# Altium PCB Flashlight PCB.PcbDoc
Units mil, origin at the board's own origin, x right, y up, seen from the top; angles counter-clockwise.
Board outline 480 x 1490 mil, 2 copper layers (Top Layer, Bottom Layer); 14 components, 13 nets, 40 pads, 5 vias.
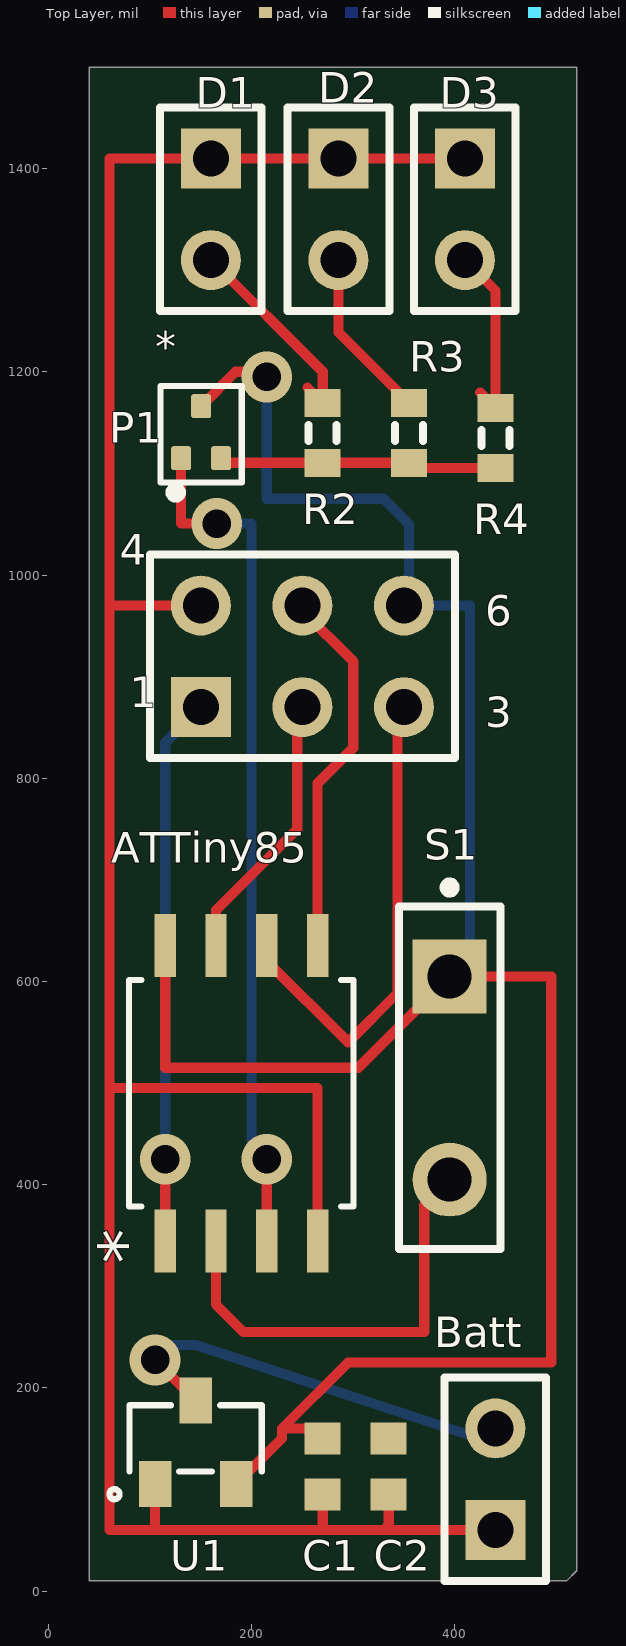
[diagram p0: Top Layer view]
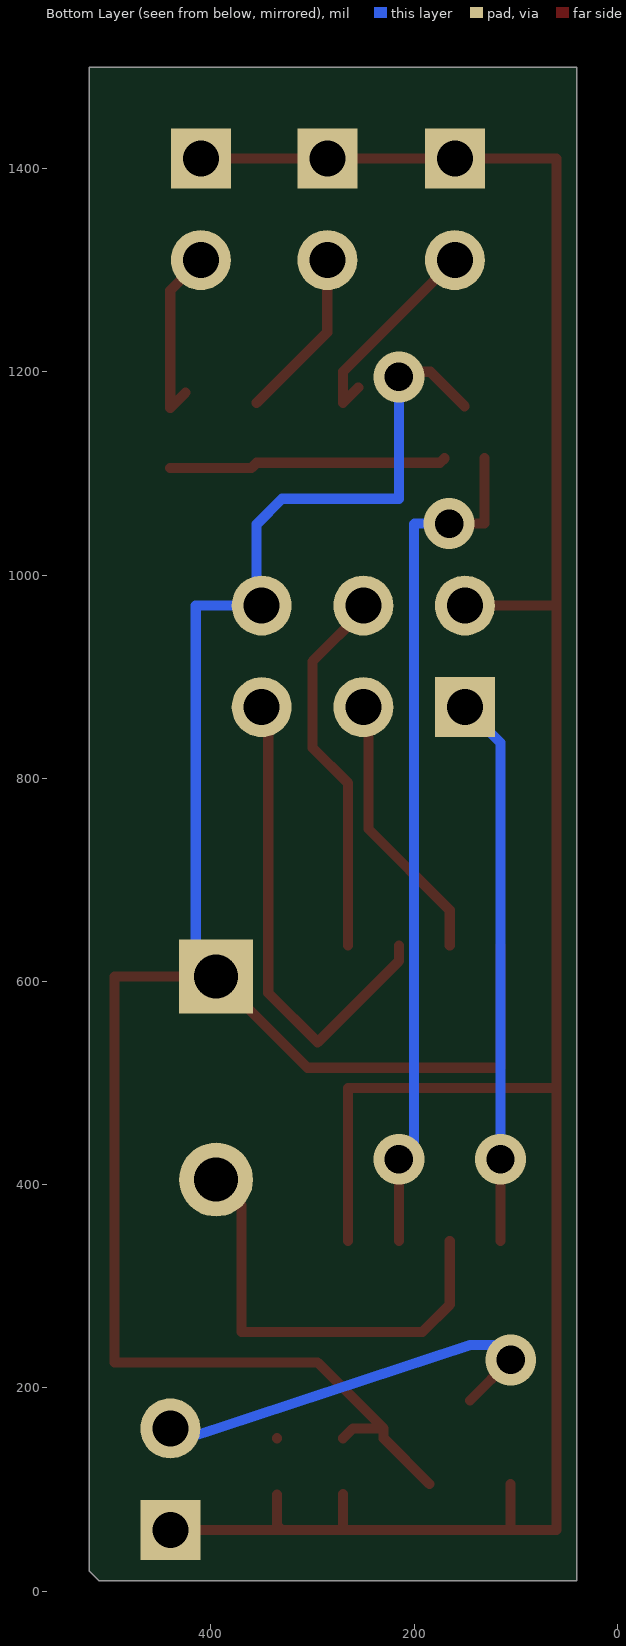
[diagram p1: Bottom Layer view, seen from below]

## Layer stack, top to bottom
Top Solder: solder mask 0.4, Solder Resist, Dk 3.5
Top Layer: signal copper 1.4
Dielectric 1: dielectric 12.6, FR-4, Dk 4.8
Bottom Layer: signal copper 1.4
Bottom Solder: solder mask 0.4, Solder Resist, Dk 3.5

## Board outline
520,1500 40,1500 40,10 510,10 520,20

## Design rules (kind name [scope] priority, off if disabled: settings)
Clearance [All] p1: gap=10 ignorepadtopadclearanceinfootprint=FALSE except(0: Arc-Hole Track-Hole SMDPad-Hole THPad-Hole Via-Hole Fill-Hole Poly-Hole Region-Hole Text-Hole)
PolygonConnect [All] p1: connectstyle=Relief reliefconductorwidth=10 reliefentries=4 polygonreliefangle="90 Angle" airgapwidth=10
RoutingVias [All] p1: holewidth=28 width=50 viastyle="Through Hole" minholewidth=28 minwidth=50 maxholewidth=28 maxwidth=50
SolderMaskExpansion [All] p1: expansion=4
Width [All] p1: maxlimit=10 minlimit=10 preferedwidth=10
30 further rules are at their usual default settings.

## Components (designator, comment, footprint, x,y, rotation, side; value= is the part's Value field where it differs from the comment)
* "N-Channel MOSFET" SOT416 150.31,1166.18 r270 top
ATTiny85 "ATTiny85" 8S2 190,490 r90 top
Batt "Header 2" HDR1X2 440,60 r90 top (schematic designator Battery)
C1 "Cap Semi" 1608[0603] 270,122.74 r90 top value=100pF
C2 "Cap Semi" 1608[0603] 335,122.56 r90 top value=100pF
D1 "LED2" HDR1X2 160,1410 r270 top
D2 "LED2" HDR1X2 285.5,1410 r270 top
D3 "LED2" HDR1X2 410,1410 r270 top
P1 "Header 3X2A" HDR2X3_CEN 150,870 r0 top
R2 "Res3" J1-0603 270,1140 r270 top value=1K
R3 "Res3" J1-0603 355,1140 r270 top value=1K
R4 "Res3" J1-0603 440,1135 r270 top value=1K
S1 "SW-PB" SPST-2 395,505 r270 top
U1 "AP2120N-3.3TRG1" SOT-23 145,150.3 r0 top value=Value

## Footprints (in the part's own frame and the unit in brackets; to place one, negate y for a bottom-side part, rotate by r counter-clockwise, add the part's x,y. Pads: shape width x height; smd on the part's side, far side on the other; paste and mask are expansions set on the pad)
8S2 [mil]
  rect 62x21 smd paste+0 mask+0: 1(-145.5,75) 2(-145.5,25) 3(-145.5,-25) 4(-145.5,-75) 5(145.5,-75) 6(145.5,-25) 7(145.5,25) 8(145.5,75)
  silkscreen extent -112,-110 112,110, body extent -157,-105 167,106, height 85
1608[0603] [mm] "Chip Capacitor, Body 1.6x0.8mm, IPC High Density"
  rect 0.8x0.9 smd: 1(-0.7,0) 2(0.7,0)
  body extent -0.87,-0.48 0.87,0.48, height 1.3
HDR1X2 [mm] "Connector; Header; 2 Position"
  rect 1.5x1.5 hole 0.9: 1(0,0)
  round 1.5 hole 0.9: 2(2.54,0)
  silkscreen extent -1.27,-1.27 3.81,1.27
HDR2X3_CEN [mm] "Connector; Header; 3x2 Position"
  rect 1.5x1.5 hole 0.9: 1(0,0)
  round 1.5 hole 0.9: 2(2.54,0) 3(5.08,0) 4(0,2.54) 5(2.54,2.54) 6(5.08,2.54)
  silkscreen extent -1.27,-1.27 6.35,3.81
J1-0603 [mm] "Chip Resistor, Body 1.6x0.8mm, IPC High Density"
  rect 0.7x0.9 smd: 1(-0.75,0) 2(0.75,0)
  silkscreen extent -0.2,-0.35 0.2,0.35, body extent -0.85,-0.48 0.85,0.48, height 0.9
SOT416 [mm]
  rrect25% 0.6x0.5 smd: 1(1.3,-0.5) 2(1.3,0.5) 3(0,0)
  silkscreen extent -0.51,-1.02 2.29,1.02
SOT-23 [mil]
  rect 32x45 smd paste+0 mask+0: 1(-40,-45) 2(40,-45) 3(0,37.2)
  silkscreen extent -85,-60 65,33, body extent -58,-62 60,50, height 47
SPST-2 [mm] "Switch; 2 Leads"
  rect 1.85x1.85 hole 1.1: 1(-2.54,0)
  round 1.85 hole 1.1: 2(2.54,0)
  silkscreen extent -4.89,-1.27 4.28,1.27

## Part data
ATTiny85: library part ATTiny85_1
Batt: "Header, 2-Pin", LatestRevisionDate=17-Jul-2002, LatestRevisionNote="Re-released for DXP Platform.", Publisher="Altium Limited"
C1 C2: "Capacitor (Semiconductor SIM Model)", LatestRevisionDate=29-May-2009, LatestRevisionNote="IPC-7351 Footprint Added.", PackageDescription="Chip Capacitor", PackageReference=C1206, Published=8-Jun-2000, Publisher="Altium Limited"
D1 D2 D3: "Typical RED, GREEN, YELLOW, AMBER GaAs LED", LatestRevisionDate=17-Jul-2002, LatestRevisionNote="Re-released for DXP Platform.", PackageDescription="SM LED; 2 Flat Leads", PackageReference=3.2X1.6X1.1, PackageVersion=Feb-2002, Published=8-Jun-2000, Publisher="Altium Limited"
P1: "Header, 3-Pin, Dual row", LatestRevisionDate=17-Jul-2002, LatestRevisionNote="Re-released for DXP Platform.", Publisher="Altium Limited"
R2 R3 R4: "Resistor", LatestRevisionDate=29-May-2009, LatestRevisionNote="IPC-7351 Footprint Added.", PackageDescription="Chip Resistor", PackageReference=J1-0603, Published=8-Jun-2000, Publisher="Altium Limited"
S1: "Switch", LatestRevisionDate=17-Jul-2002, LatestRevisionNote="Re-released for DXP Platform.", PackageDescription="Switch; 2 Leads", PackageReference=SPST-2, Published=24-Mar-1999, Publisher="Altium Limited"
U1: "IC REG LINEAR 3.3V 150MA SOT23", Built_By=EMA_UL_Team, Manufacturer_Part_Number=AP2120N-3.3TRG1, RefDes=RefDes, Type=DEV, Vendor="Diodes Inc"

## Via types
v1: diameter 50, hole 28, Top Layer to Bottom Layer, 5 vias

## Nets (pads, with @x,y where several pads share a name; then routed paths per layer and width w, separated by ;. In a path a pad name is that pad's centre, name@x,y a point inside that pad or via, vN(x,y) a via of type N, cw(c..) or ccw(c..) an arc to the next point about the centre after c; other vN are vias at no path point)
GND: ATTiny85.4 Batt.1 C1.1 C2.1 D1.1 D2.1 D3.1 P1.4 U1.1 | length 2632.2
  Top Layer w10: U1.1 105,60 ; P1.4 60,970 ; ATTiny85.4 265,495 60,495 ; C1.1 270,60 ; C2.1 335,65 330,60 ; D3.1 D2.1 D1.1 60,1410 60,970 ; Batt.1@425,50 415,60 330,60 ; 60,495 60,60 105,60 ; 60,495 60,970 ; 105,60 270,60 ; 270,60 330,60
Net*_1: *.1 ATTiny85.3 | length 845.7
  Top Layer w10: *.1 130.63,1050.63 v1(165.63,1050.63) ; ATTiny85.3 v1(215,425)
  Bottom Layer w10: v1(165.63,1050.63) 199.37,1050.63 200,1050 200,440 v1(215,425)
Net*_2: *.2 R2.2 R3.2 R4.2 | length 273.9
  Top Layer w10: *.2 174.53,1110.47 R2.2 R3.2 360,1105.47 R4.2
NetATTiny85_1: ATTiny85.1 P1.1 | length 520.1
  Top Layer w10: ATTiny85.1 v1(115,425)
  Bottom Layer w10: v1(115,425) 115,835 P1.1@135.95,855.95
NetATTiny85_2: ATTiny85.2 S1.2 | length 439.1
  Top Layer w10: ATTiny85.2 165,281.92 191.92,255 370,255 370,380 S1.2
NetATTiny85_5: ATTiny85.5 P1.5 | length 369.7
  Top Layer w10: P1.5 250,965 300,915 300,830 265,795 ATTiny85.5
NetATTiny85_6: ATTiny85.6 P1.3 | length 481.4
  Top Layer w10: ATTiny85.6 215,620 295,540 343.58,588.58 343.58,863.58 P1.3
NetATTiny85_7: ATTiny85.7 P1.2 | length 269.7
  Top Layer w10: ATTiny85.7 165,670 245,750 245,865 P1.2
NetBattery_2: Batt.2 U1.3 | length 397.5
  Top Layer w10: v1(105,227.5) U1.3
  Bottom Layer w10: v1(105,227.5) 119.7,242.2 145,242.2 Batt.2@425,150
NetD1_2: D1.2 R2.1 | length 207.2
  Top Layer w10: D1.2 270,1200 R2.1 255,1184.53
NetD2_2: D2.2 R3.1 | length 169.3
  Top Layer w10: D2.2 285.5,1239.03 R3.1
NetD3_2: D3.2 R4.1 | length 179.1
  Top Layer w10: D3.2 440,1280 R4.1 425,1179.53
VCC: *.3 ATTiny85.8 C1.2 P1.6 S1.1 U1.2 | length 2201.5
  Top Layer w10: ATTiny85.8 115,515 305,515 S1.1 ; *.3 184.13,1200 215,1200 v1(215,1195) ; U1.2 230,150.3 230,160 ; C1.2 260.3,160 230,160 ; P1.6 P1.6@355,975 ; S1.1@415,625 S1.1 ; 230,160 295,225 495,225 495,605 S1.1
  Bottom Layer w10: v1(215,1195) 215,1075 330,1075 355,1050 P1.6@355,975 ; P1.6 415,970 S1.1@415,625
pads on no net: C2.2
copper on no net: | length 0.2
  Top Layer w10: 335,150.12 335,150.3

## Text inside footprints (layer, text, board x,y; h text height)
ATTiny85: Top Overlay "*" at 99,322 h50 r90; Mechanical 13 "*" at 137.5,386 h50 r90
P1: Top Overlay "6" at 430,950 h30; Top Overlay "3" at 430,850 h30; Top Overlay "1" at 80,870 h30; Top Overlay "4" at 70,1010 h30